# EAGLE board CMCdaq (EAGLE 8.3.2), part 1 of 2
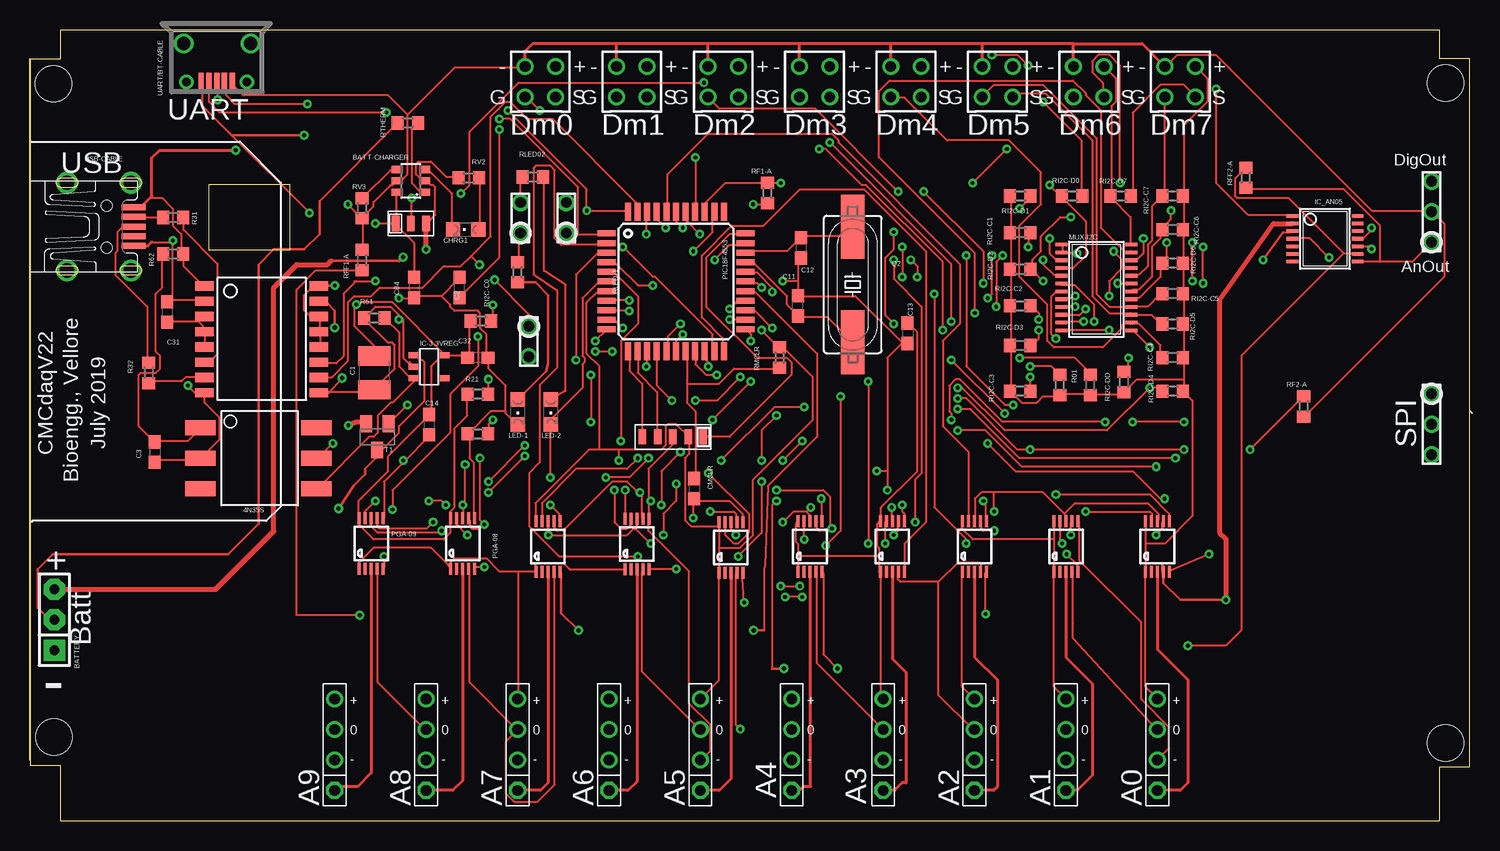
[diagram p0: board, top side]
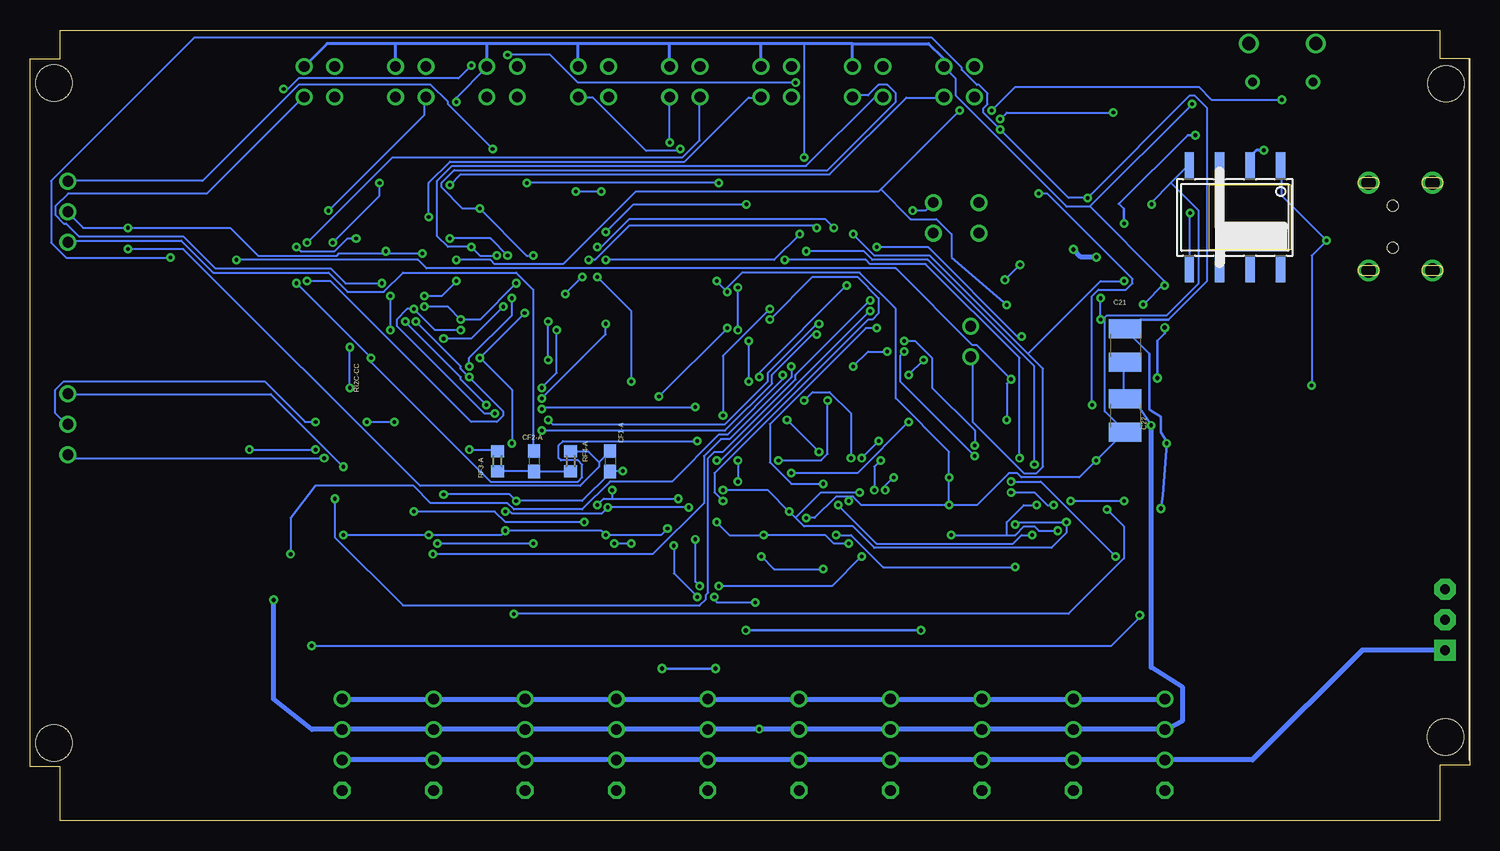
[diagram p1: board, bottom side, seen from below]

Size 120 x 65.91 mm. Coordinates in mm from the lower left corner, seen from the top.
Outline: 2.5,0 117.5,0 117.5,4.5 120,4.5 120,63.5 117.5,63.5 117.5,65.91 2.5,65.91 2.5,63.5 0,63.5 0,5.08 0,4.63 2.5,4.63 2.5,0
Copper layers (1*16): Top 0.035mm / dielectric 1.5mm / Bottom 0.035mm
Design rules "default": minimum track width 7mil, minimum drill 12mil, track to track 7mil, track to pad 7mil, pad to pad 7mil, via to via 7mil, smd to smd 7mil, copper to edge 10mil, drill to drill 6mil, minimum pad ring 10mil, minimum via ring 8mil, stop-mask expansion 4mil, vias tented up to drill 0mil, thermal gap 10mil
Holes 3 mm at 1.96,61.44 118,61.5 2,7 118,6.5
Milling: area 14.9,47.6 to 21.7,53

## Footprints (pad centres in the part's own frame; a part is rotated, then mirrored left to right if it is on the bottom)
SMD6 = smd 1.27 x 2.54: P$1 -2.54,-4.826; P$2 0,-4.826; P$3 2.54,-4.826; P$4 2.54,4.826; P$5 0,4.826; P$6 -2.54,4.826
SOT23-6 = smd 0.6 x 0.9: 1 -0.95,-1.15; 2 0,-1.15; 3 0.95,-1.15; 4 0.95,1.15; 5 0,1.15; 6 -0.95,1.15
SIP-100-03-32 = drill 0.813 pad 1.778 square: 1 -2.54,0 | drill 0.813 pad 1.778 octagon: 2 0,0; 3 2.54,0
C1210 = smd 1.6 x 2.7: 1 -1.4,0; 2 1.4,0
C0603 = smd 1.1 x 1: 1 -0.85,0; 2 0.85,0
CHIPLED_0805 = smd 1.2 x 1.2: A 0,-1.05; C 0,1.05
CON-3PIN = drill 0.9: 1 2.575,0; 2 0.035,0; 3 -2.505,0
CON-4PIN = drill 0.9: 1 1.27,-1.905; 2 -1.27,-1.905; 3 1.27,0.635; 4 -1.27,0.635
SOIC16-1 = smd 0.762 x 1.524: 1 -4.445,-4.505; 2 -3.175,-4.505; 3 -1.905,-4.505; 4 -0.635,-4.505; 5 0.635,-4.505; 6 1.905,-4.505; 7 3.175,-4.505; 8 4.445,-4.505; 9 4.445,5.045; 10 3.175,5.045; 11 1.905,5.045; 12 0.635,5.045; 13 -0.635,5.045; 14 -1.905,5.045; 15 -3.175,5.045; 16 -4.445,5.045
SOT23-5 = smd 0.5 x 1: 1 -0.95,-1.2; 2 0,-1.2; 3 0.95,-1.2; 4 0.95,1.2; 5 -0.95,1.2
TSSOP14 = smd 0.305 x 0.991: 1 -1.905,-2.718; 2 -1.27,-2.718; 3 -0.635,-2.718; 4 0,-2.718; 5 0.635,-2.718; 6 1.27,-2.718; 7 1.905,-2.718; 8 1.905,2.718; 9 1.27,2.718; 10 0.635,2.718; 11 0,2.718; 12 -0.635,2.718; 13 -1.27,2.718; 14 -1.905,2.718
CON-5PIN-SMD = smd 1.27 x 0.635: P$1 0,3.81; P$2 0,2.54; P$3 0,1.27; P$4 0,0; P$5 0,-1.27
CON-2PIN = drill 0.9: 1 1.305,-1.27; 2 -1.235,-1.27
TSSOP24 = smd 0.305 x 0.991: 1 -3.575,-2.918; 2 -2.925,-2.918; 3 -2.275,-2.918; 4 -1.625,-2.918; 5 -0.975,-2.918; 6 -0.325,-2.918; 7 0.325,-2.918; 8 0.975,-2.918; 9 1.625,-2.918; 10 2.275,-2.918; 11 2.925,-2.918; 12 3.575,-2.918; 13 3.575,2.918; 14 2.925,2.918; 15 2.275,2.918; 16 1.625,2.918; 17 0.975,2.918; 18 0.325,2.918; 19 -0.325,2.918; 20 -0.975,2.918; 21 -1.625,2.918; 22 -2.275,2.918; 23 -2.925,2.918; 24 -3.575,2.918
MSOP10 = smd 0.25 x 1: 1 -1,-2.113; 2 -0.5,-2.113; 3 0,-2.113; 4 0.5,-2.113; 5 1,-2.113; 6 1,2.113; 7 0.5,2.113; 8 0,2.113; 9 -0.5,2.113; 10 -1,2.113
TQFP44 = smd 1.5 x 0.5: 1 -5.8,4; 2 -5.8,3.2; 3 -5.8,2.4; 4 -5.8,1.6; 5 -5.8,0.8; 6 -5.8,0; 7 -5.8,-0.8; 8 -5.8,-1.6; 9 -5.8,-2.4; 10 -5.8,-3.2; 11 -5.8,-4; 23 5.8,-4; 24 5.8,-3.2; 25 5.8,-2.4; 26 5.8,-1.6; 27 5.8,-0.8; 28 5.8,0; 29 5.8,0.8; 30 5.8,1.6; 31 5.8,2.4; 32 5.8,3.2; 33 5.8,4 | smd 0.5 x 1.5: 12 -4,-5.8; 13 -3.2,-5.8; 14 -2.4,-5.8; 15 -1.6,-5.8; 16 -0.8,-5.8; 17 0,-5.8; 18 0.8,-5.8; 19 1.6,-5.8; 20 2.4,-5.8; 21 3.2,-5.8; 22 4,-5.8; 34 4,5.8; 35 3.2,5.8; 36 2.4,5.8; 37 1.6,5.8; 38 0.8,5.8; 39 0,5.8; 40 -0.8,5.8; 41 -1.6,5.8; 42 -2.4,5.8; 43 -3.2,5.8; 44 -4,5.8
CON-3PIN-SMD = smd 1.27 x 0.635: P$1 0,1.27; P$2 0,0; P$3 0,-1.27
HC49UP = smd 5.334 x 1.93: 1 -4.826,0; 2 4.826,0
R0603 = smd 1 x 1.1: 1 -0.85,0; 2 0.85,0
SOT23-BEC = smd 1 x 1.4: B -0.95,-1.1; C 0,1.1; E 0.95,-1.1
CONN-4PINSIL2 = drill 0.9: AGND 0,1.27; V+ 0,3.81; V- 0,-1.27 | drill 0.9 octagon: SIG 0,-3.81
MICRO-USB1 = smd 0.45 x 1.7: 1 -1.28,2.16; 2 -0.63,2.16; 3 0.02,2.16; 4 0.67,2.16; 5 1.32,2.16 | drill 0.7 pad 1: P$1 -2.5,2.07; P$3 2.54,2.07 | drill 1.1 pad 1.5: P$2 -2.803,-1.125; P$5 2.77,-1.13
MINI-USB = smd 0.5 x 2: 1 -1.6,4.84; 2 -0.8,4.84; 3 0,4.84; 4 0.8,4.84; 5 1.6,4.84 | drill 1.2 pad 1.6: M1 3.65,-0.71; M2 -3.65,-0.71; M3 -3.65,4.59; M4 3.65,4.59 | hole 0.9: 1.75,2.59; -1.75,2.59
SO08-GW = smd 0.762 x 2.21: 1 -3.81,-4.318; 2 -1.27,-4.318; 3 1.27,-4.318; 4 3.81,-4.318; 5 3.81,4.318; 6 1.27,4.318; 7 -1.27,4.318; 8 -3.81,4.318

## Placement (x,y rotation side)
4N35S  4N35S  [SMD6]  19.05,30.23 270 top
BATT-CHARGER  BG21040  [SOT23-6]  31.75,53.34 90 top
BATTERY  F-1X03-SIP-100-32  [SIP-100-03-32]  2.03,16.76 90 top
C1  100uF  [C1210]  28.7,37.34 270 top
C2  1uF  [C0603]  35.81,44.45 90 top
C3  0.1uF  [C0603]  10.41,30.73 270 top
C11  15pF  [C0603]  64.01,42.93 90 top
C12  15pF  [C0603]  64.26,47.75 270 top
C13  0.1uF  [C0603]  73.15,40.64 270 top
C14  0.1uF  [C0603]  33.27,33.02 270 top
C21  100uF  [C1210]  28.7,39.62 270 bottom
C22  100uF  [C1210]  28.7,33.78 270 bottom
C31  1uF  [C0603]  11.43,42.42 270 top
C32  1uF  [C0603]  37.34,38.61 180 top
C84  0.1uF  [C0603]  32,44.45 270 top
CF1-A  0.1u  [C0603]  71.63,29.97 270 bottom
CF2-A  0.1u  [C0603]  77.98,29.97 270 bottom
CHRG1  chrg  [CHIPLED_0805]  36.32,49.28 90 top
CMCLR  0.1u  [C0603]  55.37,27.69 270 top
DAC/DOUT  CON-3PINDRILL  [CON-3PIN]  116.84,50.8 270 top
I2CMOD1  CABLE-4PIN  [CON-4PIN]  50.16,60.96 180 top
I2CMOD2  CABLE-4PIN  [CON-4PIN]  57.78,60.96 180 top
I2CMOD3  CABLE-4PIN  [CON-4PIN]  65.41,60.96 180 top
I2CMOD4  CABLE-4PIN  [CON-4PIN]  73.03,60.96 180 top
I2CMOD5  CABLE-4PIN  [CON-4PIN]  80.64,60.96 180 top
I2CMOD6  CABLE-4PIN  [CON-4PIN]  88.27,60.96 180 top
I2CMOD7  CABLE-4PIN  [CON-4PIN]  95.89,60.96 180 top
I2CMOD-0  CABLE-4PIN  [CON-4PIN]  42.55,60.96 180 top
IC30  ADUM4160  [SOIC16-1]  19.05,40.13 270 top
IC-3.3VREG  LDO-MIC5307  [SOT23-5]  33.27,37.85 270 top
IC_AN05  MCP6004  [TSSOP14]  107.95,48.51 270 top
ICSP  CON-5PINSMD  [CON-5PIN-SMD]  52.32,32 270 top
LED  CON-2PIN''STD"  [CON-2PIN]  42.16,50.29 270 top
LED-1  B  [CHIPLED_0805]  40.67,34.08 180 top
LED-2  B  [CHIPLED_0805]  43.42,34.08 180 top
MUX-I2C  TCA9548-I2CMUX  [TSSOP24]  88.9,44.45 270 top
PGA-00  PGA113  [MSOP10]  93.98,22.86 0 top
PGA-01  PGA113  [MSOP10]  86.36,22.86 0 top
PGA-02  PGA113  [MSOP10]  78.74,22.86 0 top
PGA-03  PGA113  [MSOP10]  71.88,22.86 0 top
PGA-04  PGA113  [MSOP10]  65.02,22.86 0 top
PGA-05  PGA113  [MSOP10]  58.43,22.8 0 top
PGA-06  PGA113  [MSOP10]  50.58,23.08 0 top
PGA-07  PGA113  [MSOP10]  43.18,22.86 0 top
PGA-08  PGA113  [MSOP10]  36.07,23.11 0 top
PGA-09  PGA113  [MSOP10]  28.45,23.11 0 top
PIC18F4553  PIC18F4550_TQFP  [TQFP44]  53.85,44.96 0 top
PWR-USB/BATT  CON-3PINSMD  [CON-3PIN-SMD]  31.75,49.78 90 top
Q2  20MHz  [HC49UP]  68.58,44.7 270 top
R01  100K  [R0603]  85.85,36.32 90 top
R21  100K  [R0603]  37.34,35.56 0 top
R22  100K  [R0603]  37.34,32.26 180 top
R31  47E  [R0603]  11.94,50.29 0 top
R32  47E  [R0603]  9.91,37.34 270 top
R61  1K  [R0603]  28.7,41.91 180 top
R62  330E  [R0603]  11.94,47.24 180 top
RF1-A  82K  [R0603]  61.47,52.32 270 top
RF2-A  82K  [R0603]  106.17,34.54 270 top
RF3-A  82K  [R0603]  81.03,29.97 90 bottom
RF4-A  82K  [R0603]  74.93,29.97 270 bottom
RFF1-A  7.8K  [R0603]  27.69,46.74 90 top
RFF2-A  10K  [R0603]  101.35,53.59 90 top
RI2C-C0  5K  [R0603]  37.59,41.66 0 top
RI2C-C1  5K  [R0603]  82.55,49.02 0 top
RI2C-C2  5K  [R0603]  82.55,42.93 0 top
RI2C-C3  5K  [R0603]  82.55,35.81 0 top
RI2C-C4  5K  [R0603]  95.25,38.61 180 top
RI2C-C5  5K  [R0603]  95.25,43.94 180 top
RI2C-C6  5K  [R0603]  95.25,49.28 180 top
RI2C-C7  5K  [R0603]  95.25,52.07 180 top
RI2C-CC  5K  [R0603]  91.19,36.58 90 top
RI2C-D0  5K  [R0603]  86.87,52.07 180 top
RI2C-D1  5K  [R0603]  82.55,52.07 0 top
RI2C-D2  5K  [R0603]  82.55,45.97 0 top
RI2C-D3  5K  [R0603]  82.55,39.62 0 top
RI2C-D4  5K  [R0603]  95.25,35.81 180 top
RI2C-D5  5K  [R0603]  95.25,41.4 180 top
RI2C-D6  5K  [R0603]  95.25,46.48 180 top
RI2C-D7  5K  [R0603]  90.93,52.07 0 top
RI2C-DD  5K  [R0603]  88.39,36.32 90 top
RLED02  330E  [R0603]  41.92,53.65 180 top
RLED-1  330E  [R0603]  40.64,45.72 90 top
RMCLR  10K  [R0603]  62.48,38.61 270 top
RTHERM  1k  [R0603]  31.5,58.17 180 top
RV2  1k  [R0603]  36.58,53.59 0 top
RV3  1k  [R0603]  27.69,51.05 90 top
SPI  CON-3PINDRILL  [CON-3PIN]  116.84,33.02 90 top
T1  2N3904  [SOT23-BEC]  28.96,32 180 top
U$1  CON-4PIN_SIL  [CONN-4PINSIL2]  93.98,6.35 0 top
U$2  CON-4PIN_SIL  [CONN-4PINSIL2]  86.36,6.35 0 top
U$3  CON-4PIN_SIL  [CONN-4PINSIL2]  78.74,6.35 0 top
U$4  CON-4PIN_SIL  [CONN-4PINSIL2]  71.12,6.35 0 top
U$5  CON-4PIN_SIL  [CONN-4PINSIL2]  63.5,6.35 0 top
U$6  CON-4PIN_SIL  [CONN-4PINSIL2]  55.88,6.35 0 top
U$7  CON-4PIN_SIL  [CONN-4PINSIL2]  48.26,6.35 0 top
U$8  CON-4PIN_SIL  [CONN-4PINSIL2]  40.64,6.35 0 top
U$9  CON-4PIN_SIL  [CONN-4PINSIL2]  33.02,6.35 0 top
U$10  CON-4PIN_SIL  [CONN-4PINSIL2]  25.4,6.35 0 top
UART  CON-2PIN''STD"  [CON-2PIN]  45.97,50.29 270 top
UART/BT-CABLE  UART  [MICRO-USB1]  15.59,63.65 180 top
USB-CABLE  USB-port  [MINI-USB]  3.81,49.53 270 top
USB-DATA  CON-2PIN''STD"  [CON-2PIN]  40.31,39.91 90 top
VBT-ISOLPWR  VBT1-SMT  [SO08-GW]  19.56,50.29 180 bottom

## Library data of the parts
4N35S = optocoupler
BATT-CHARGER = surdev
BATTERY = con-headers-jp
C1-C3 C11-C14 C21 C22 C31 C32 C84 CF1-A CF2-A CMCLR = rcl; SPICEPREFIX: C
CHRG1 LED-1 LED-2 = led
DAC/DOUT I2CMOD1-I2CMOD7 I2CMOD-0 ICSP LED MUX-I2C PWR-USB/BATT SPI U$1-U$10 UART USB-DATA = CMCbioengg
IC30 PGA-00 PGA-01-PGA-09 VBT-ISOLPWR = CMCdaq_addl
IC-3.3VREG = surdev_Aug2015
IC_AN05 = linear
PIC18F4553 = microchip; MF: MICROCHIP; MPN: PIC18F4550-I/PT; OC_FARNELL: 9321365; OC_NEWARK: 08J9633
Q2 = crystal; OC_FARNELL: unknown; OC_NEWARK: unknown
R01 R21 R22 R31 R32 R61 R62 RF1-A RF2-A RF3-A RF4-A RFF1-A RFF2-A RI2C-C0 RI2C-C1-RI2C-C7 RI2C-CC RI2C-D0 RI2C-D1-RI2C-D7 RI2C-DD RLED02 RLED-1 RMCLR RTHERM RV2 RV3 = rcl; SPICEPREFIX: R
T1 = transistor
UART/BT-CABLE USB-CABLE = Syrpai_01012015

## Nets
+3V3: C1.1 C13.1 C14.1 C32.2 I2CMOD1.2 I2CMOD2.2 I2CMOD3.2 I2CMOD4.2 I2CMOD5.2 I2CMOD6.2 I2CMOD7.2 I2CMOD-0.2 IC30.12 IC30.13 IC30.14 IC30.16 IC-3.3VREG.5 ICSP.P$2 MUX-I2C.24 PGA-00.1 PGA-00.10 PGA-01.1 PGA-01.10 PGA-02.1 PGA-02.10 PGA-03.1 PGA-03.10 PGA-04.1 PGA-04.10 PGA-05.1 PGA-05.10 PGA-06.1 PGA-06.10 PGA-07.1 PGA-07.10 PGA-08.1 PGA-08.10 PGA-09.1 PGA-09.10 PIC18F4553.7 PIC18F4553.28 PIC18F4553.37 R01.1 R21.1 RI2C-C0.1 RI2C-C1.1 RI2C-C2.1 RI2C-C3.1 RI2C-C4.1 RI2C-C5.1 RI2C-C6.1 RI2C-C7.1 RI2C-CC.1 RI2C-D0.1 RI2C-D1.1 RI2C-D2.1 RI2C-D3.1 RI2C-D4.1 RI2C-D5.1 RI2C-D6.1 RI2C-D7.1 RI2C-DD.1 RMCLR.1 U$1.V+ U$2.V+ U$3.V+ U$4.V+ U$5.V+ U$6.V+ U$7.V+ U$8.V+ U$9.V+ U$10.V+ UART/BT-CABLE.2
+4.1V: BATT-CHARGER.2 BATTERY.3 PWR-USB/BATT.P$3 RV2.1
+5V: BATT-CHARGER.6 C84.1 PWR-USB/BATT.P$1 UART/BT-CABLE.5 VBT-ISOLPWR.5
+UB: 4N35S.P$5 C2.1 C21.1 IC-3.3VREG.1 IC_AN05.4 PWR-USB/BATT.P$2 T1.C
+VUSB: IC30.1 R62.1 USB-CABLE.1 VBT-ISOLPWR.2
-VUSB: 4N35S.P$2 C3.2 C31.1 IC30.2 IC30.8 USB-CABLE.5 VBT-ISOLPWR.1
AGND: C21.2 C22.1 IC_AN05.2 PGA-00.4 PGA-01.4 PGA-02.4 PGA-03.4 PGA-04.4 PGA-05.4 PGA-06.4 PGA-07.4 PGA-08.4 PGA-09.4 T1.E U$1.AGND U$2.AGND U$3.AGND U$4.AGND U$5.AGND U$6.AGND U$7.AGND U$8.AGND U$9.AGND U$10.AGND
AN0: PGA-00.5 PIC18F4553.19
AN1: PGA-01.5 PIC18F4553.20
AN2: PGA-02.5 PIC18F4553.21
AN3: PGA-03.5 PIC18F4553.22
AN4: PGA-04.5 PIC18F4553.24
AN5: PGA-05.5 PIC18F4553.25
AN6: PGA-06.5 PIC18F4553.26
AN7: PGA-07.5 PIC18F4553.27
AN8: PGA-08.5 PIC18F4553.10
AN9: PGA-09.5 PIC18F4553.11
BATT-TEMP: BATTERY.2 RTHERM.2
CABLE-TX/PIC-RX: PIC18F4553.1 UART.1 UART/BT-CABLE.4
CH-00: PGA-00.3 U$1.SIG
CH-01: PGA-01.3 U$2.SIG
CH-02: PGA-02.3 U$3.SIG
CH-03: PGA-03.3 U$4.SIG
CH-04: PGA-04.3 U$5.SIG
CH-05: PGA-05.3 U$6.SIG
CH-06: PGA-06.3 U$7.SIG
CH-07: PGA-07.3 U$8.SIG
CH-08: PGA-08.3 U$9.SIG
CH-09: PGA-09.3 U$10.SIG
DAC: CF2-A.1 DAC/DOUT.1 IC_AN05.8 RFF2-A.1
FILTA-0: RF1-A.2 RF2-A.1 RF3-A.2
FILTA-1: CF2-A.2 RF3-A.1 RF4-A.2
FILTA-2: CF1-A.1 IC_AN05.10 RF4-A.1
FILTA-3: IC_AN05.9 RFF1-A.1 RFF2-A.2
I2C_C-0: I2CMOD-0.3 MUX-I2C.5 RI2C-C0.2
I2C_C-1: I2CMOD1.3 MUX-I2C.7 RI2C-C1.2
I2C_C-2: I2CMOD2.3 MUX-I2C.9 RI2C-C2.2
I2C_C-3: I2CMOD3.3 MUX-I2C.11 RI2C-C3.2
I2C_C-4: I2CMOD4.3 MUX-I2C.14 RI2C-C4.2
I2C_C-5: I2CMOD5.3 MUX-I2C.16 RI2C-C5.2
I2C_C-6: I2CMOD6.3 MUX-I2C.18 RI2C-C6.2
I2C_C-7: I2CMOD7.3 MUX-I2C.20 RI2C-C7.2
I2C_D-0: I2CMOD-0.4 MUX-I2C.4 RI2C-D0.2
I2C_D-1: I2CMOD1.4 MUX-I2C.6 RI2C-D1.2
I2C_D-2: I2CMOD2.4 MUX-I2C.8 RI2C-D2.2
I2C_D-3: I2CMOD3.4 MUX-I2C.10 RI2C-D3.2
I2C_D-4: I2CMOD4.4 MUX-I2C.13 RI2C-D4.2
I2C_D-5: I2CMOD5.4 MUX-I2C.15 RI2C-D5.2
I2C_D-6: I2CMOD6.4 MUX-I2C.17 RI2C-D6.2
I2C_D-7: I2CMOD7.4 MUX-I2C.19 RI2C-D7.2
N$2: R32.1 USB-CABLE.3
N$6: MUX-I2C.23 PIC18F4553.8 RI2C-DD.2
N$11: 4N35S.P$4 IC-3.3VREG.3 R61.1
N$18: MUX-I2C.22 PIC18F4553.9 RI2C-CC.2
N$20: LED-1.A RLED-1.1
N$21: LED-2.A RLED02.1
N$22: C31.2 IC30.3 IC30.4 IC30.5
N$24: IC_AN05.1 T1.B
N$26: BATT-CHARGER.4 RV3.2
N$29: BATT-CHARGER.3 CHRG1.C
N$34: IC_AN05.3 R21.2 R22.1
N$35: CHRG1.A RV2.2
N$36: LED.1 RLED-1.2
N$38: LED.2 RLED02.2
N$42: 4N35S.P$1 C3.1 R62.2
N$56: BATT-CHARGER.1 RTHERM.1
N$74: C11.1 PIC18F4553.30 Q2.2
N$117: CMCLR.1 PIC18F4553.18 RMCLR.2
N$118: MUX-I2C.3 R01.2
N$D+: IC30.7 R32.2
N$D-: IC30.6 R31.2
N$D--: R31.1 USB-CABLE.2
OSC2: C12.1 PIC18F4553.31 Q2.1
PGA-CS00: PGA-00.9 PIC18F4553.38
PGA-CS01: PGA-01.9 PIC18F4553.39
PGA-CS02: PGA-02.9 PIC18F4553.40
PGA-CS03: PGA-03.9 PIC18F4553.41
PGA-CS04: PGA-04.9 PIC18F4553.2
PGA-CS05: PGA-05.9 PIC18F4553.3
PGA-CS06: PGA-06.9 PIC18F4553.4
PGA-CS07: PGA-07.9 PIC18F4553.5
PGA-CS08: PGA-08.9 PIC18F4553.23
PGA-CS09: PGA-09.9 PIC18F4553.14
PGA-SCK: PGA-00.7 PGA-01.7 PGA-02.7 PGA-03.7 PGA-04.7 PGA-05.7 PGA-06.7 PGA-07.7 PGA-08.7 PGA-09.7 PIC18F4553.32
PGA-SDA: PGA-00.8 PGA-01.8 PGA-02.8 PGA-03.8 PGA-04.8 PGA-05.8 PGA-06.8 PGA-07.8 PGA-08.8 PGA-09.8 PIC18F4553.35
PGC: ICSP.P$5 PIC18F4553.12
PGD: ICSP.P$4 PIC18F4553.13
PIC-TX/CABLE-RX: PIC18F4553.44 UART.2 UART/BT-CABLE.3
PWM-DIG: DAC/DOUT.3 PIC18F4553.36 RF1-A.1
SPI-SCK: PIC18F4553.17 SPI.1
SPI-SDI: PIC18F4553.15 SPI.3
SPI-SDO: PIC18F4553.16 SPI.2
USB-D+: IC30.10 PIC18F4553.43 USB-DATA.1
USB-D-: IC30.11 PIC18F4553.42 USB-DATA.2
VPP: ICSP.P$1 PIC18F4553.33
VSS: BATT-CHARGER.5 BATTERY.1 C1.2 C2.2 C11.2 C12.2 C13.2 C14.2 C22.2 C32.1 C84.2 CF1-A.2 CMCLR.2 DAC/DOUT.2 I2CMOD1.1 I2CMOD2.1 I2CMOD3.1 I2CMOD4.1 I2CMOD5.1 I2CMOD6.1 I2CMOD7.1 I2CMOD-0.1 IC30.9 IC30.15 IC-3.3VREG.2 IC_AN05.11 ICSP.P$3 LED-1.C LED-2.C MUX-I2C.1 MUX-I2C.2 MUX-I2C.12 MUX-I2C.21 PGA-00.6 PGA-01.6 PGA-02.6 PGA-03.6 PGA-04.6 PGA-05.6 PGA-06.6 PGA-07.6 PGA-08.6 PGA-09.6 PIC18F4553.6 PIC18F4553.29 R22.2 R61.2 RF2-A.2 RFF1-A.2 RV3.1 U$1.V- U$2.V- U$3.V- U$4.V- U$5.V- U$6.V- U$7.V- U$8.V- U$9.V- U$10.V- UART/BT-CABLE.1 VBT-ISOLPWR.4